# EAGLE board power board1 (EAGLE 9.6.2)
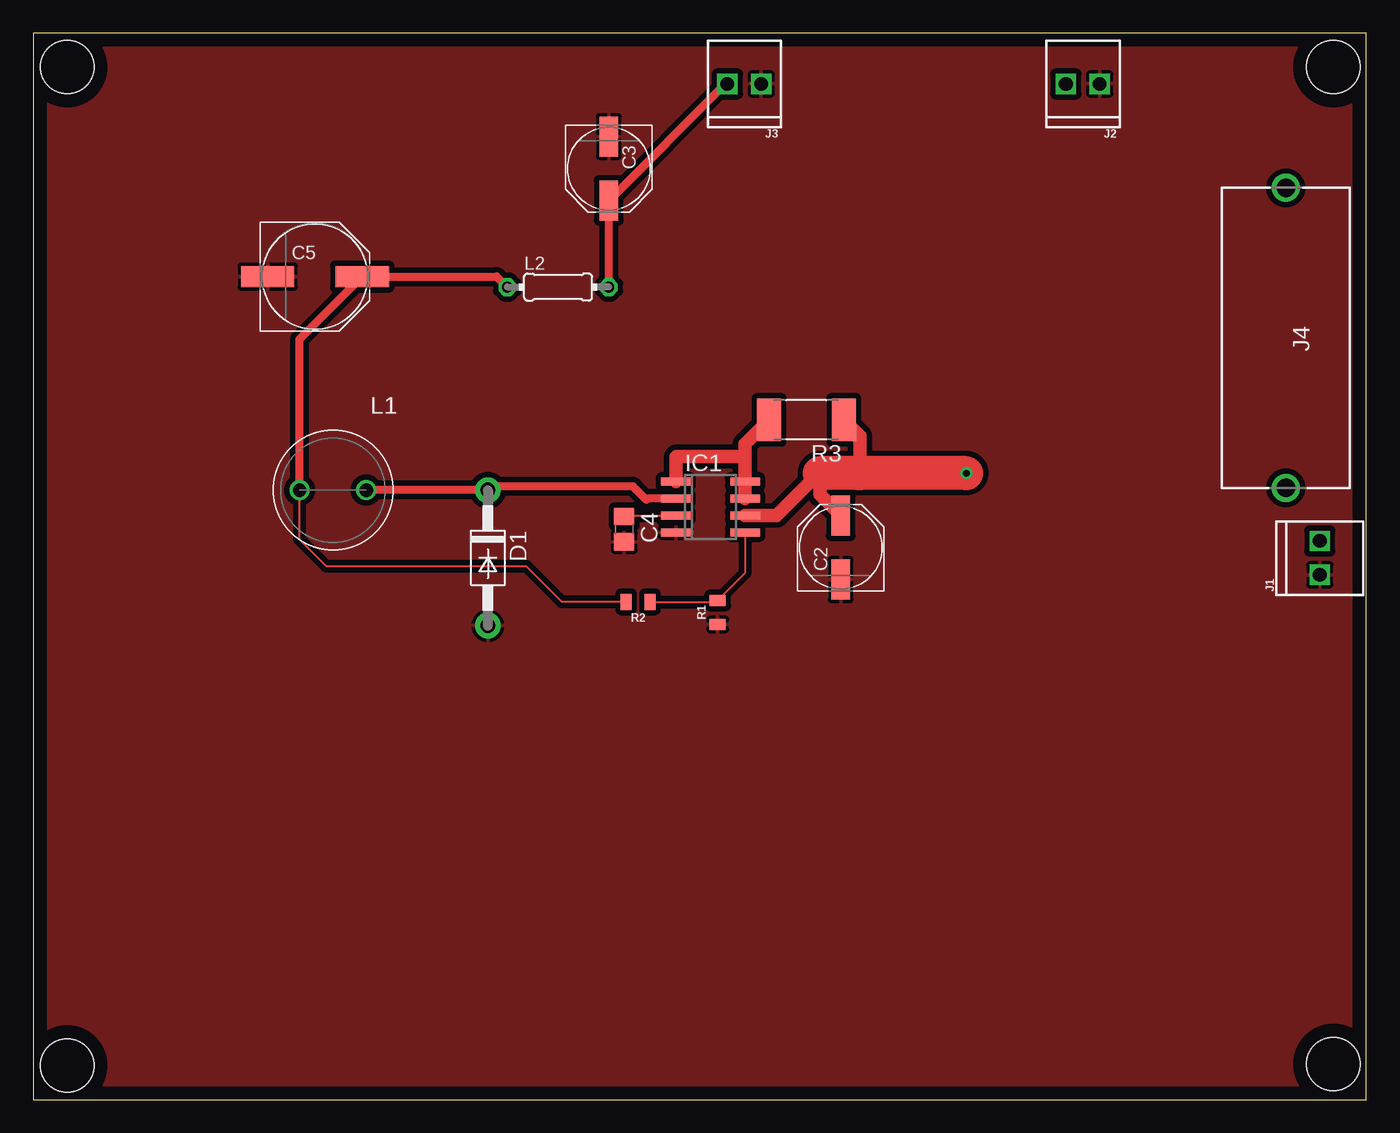
[diagram p0: board, top side]
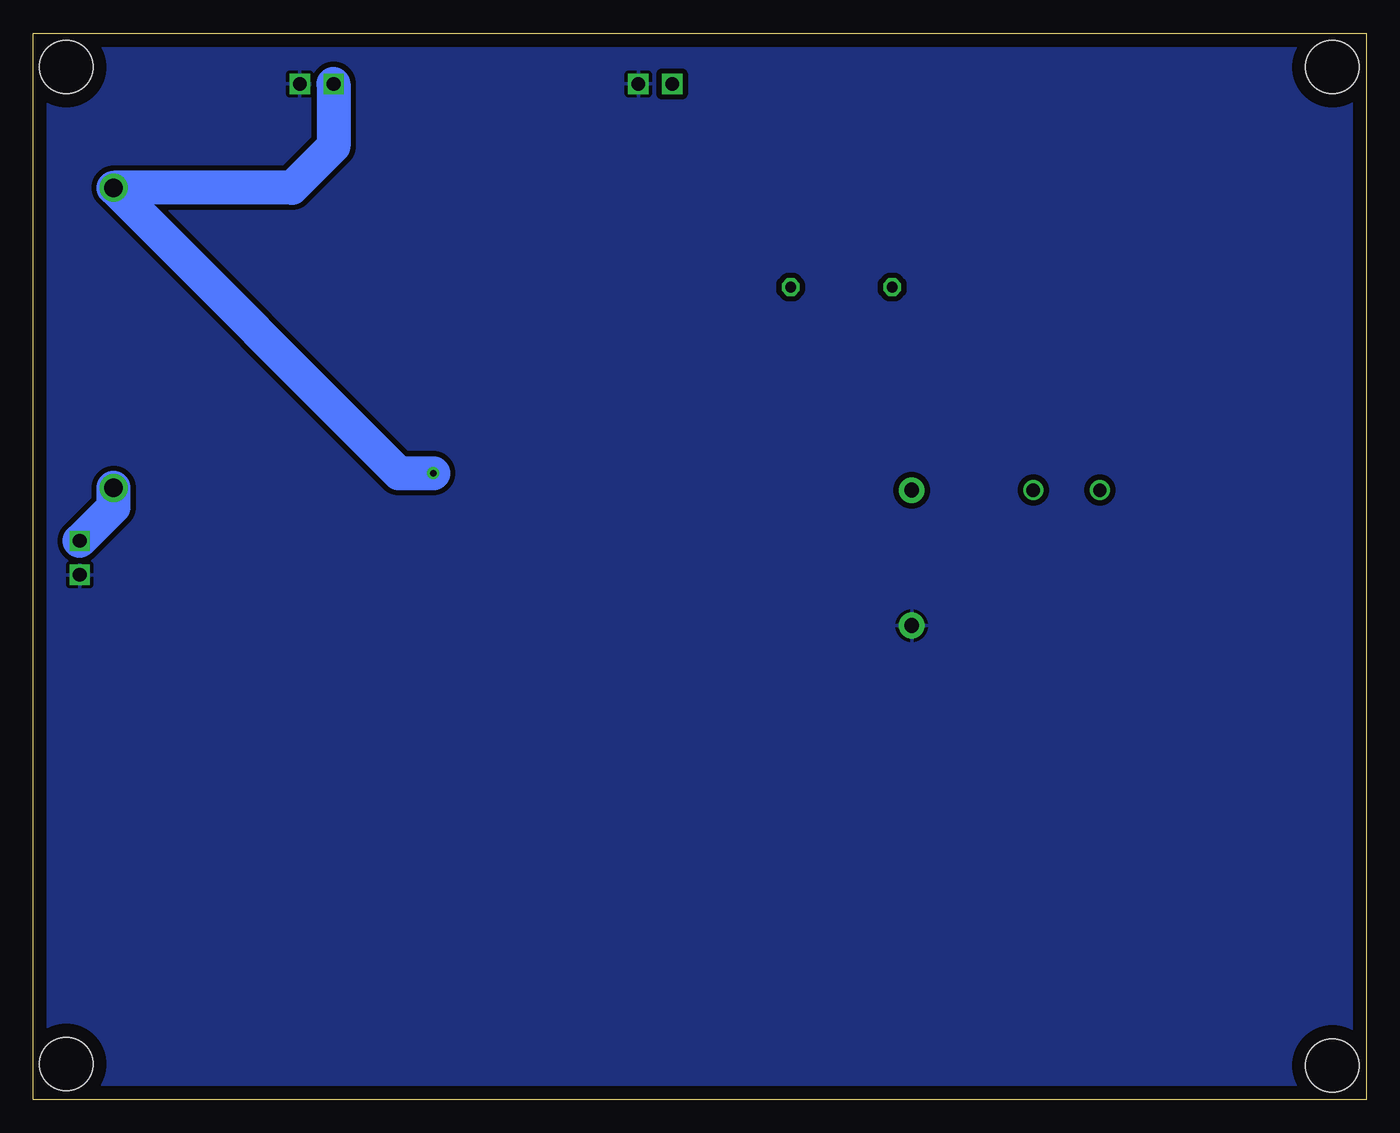
[diagram p1: board, bottom side, seen from below]

Size 100 x 80 mm. Coordinates in mm from the lower left corner, seen from the top.
Outline: 0,0 100,0 100,80 0,80 0,0
Copper layers (1*16): Top 0.035mm / dielectric 1.5mm / Bottom 0.035mm
Design rules "default": minimum track width 6mil, minimum drill 0.35mm, track to track 6mil, track to pad 6mil, pad to pad 6mil, via to via 6mil, smd to smd 6mil, copper to edge 40mil, drill to drill 6mil, minimum pad ring 10mil, minimum via ring 8mil, stop-mask expansion 4mil, vias tented up to drill 0mil, thermal gap 10mil
Holes 4 mm at 2.54,77.47 2.54,2.54 97.54,2.67 97.54,77.47

## Footprints (pad centres in the part's own frame; a part is rotated, then mirrored left to right if it is on the bottom)
PANASONIC_D = smd 3 x 1.4: + 2.4,0; - -2.4,0
C0805 = smd 1.3 x 1.5: 1 -0.95,0; 2 0.95,0
PANASONIC_F = smd 4 x 1.6: + 3.55,0; - -3.55,0
DO41-10 = drill 1.118 pad 1.93: A 5.08,0; C -5.08,0
SOIC8 = smd 0.6 x 2.2: 1 -1.905,-2.6; 2 -0.635,-2.6; 3 0.635,-2.6; 4 1.905,-2.6; 5 1.905,2.6; 6 0.635,2.6; 7 -0.635,2.6; 8 -1.905,2.6
1X02_2.54_SCREWTERM = drill 1.016 square: P1 2.54,0; P2 0,0
0031.8201 = drill 1.4 pad 2.1: 1 -11.25,0; 2 11.25,0
WE-TI_809589 = drill 1 pad 1.5: 1 -2.5,0; 2 2.5,0
0204/7 = drill 0.813 octagon: 1 -3.81,0; 2 3.81,0
0805 = smd 0.8 x 1.2: 1 -0.9,0; 2 0.9,0
R2512 = smd 1.8 x 3.2: 1 -2.8,0; 2 2.8,0

## Placement (x,y rotation side)
C2  100uF  [PANASONIC_D]  60.58,41.4 90 top
C3  100uF  [PANASONIC_D]  43.18,69.85 270 top
C4  470pF  [C0805]  44.32,42.8 270 top
C5  470uF  [PANASONIC_F]  21.13,61.75 0 top
D1  [DO41-10]  34.1,40.64 270 top
IC1  MC34063AD  [SOIC8]  50.8,44.45 270 top
J1  [1X02_2.54_SCREWTERM]  96.52,39.37 90 top
J2  [1X02_2.54_SCREWTERM]  80.01,76.2 180 top
J3  [1X02_2.54_SCREWTERM]  54.61,76.2 180 top
J4  0031.8201  [0031.8201]  93.98,57.15 270 top
L1  744772220  [WE-TI_809589]  22.48,45.72 180 top
L2  1uH  [0204/7]  39.37,60.96 0 top
R1  1.2k  [0805]  51.34,36.55 90 top
R2  3.8k  [0805]  45.37,37.34 180 top
R3  0.33  [R2512]  58,51 180 top

## Library data of the parts
C2 C3 C5 D1 R3 = adafruit
C4 = rcl; SPICEPREFIX: C
IC1 = mc34063
J1-J3 = SparkFun-Connectors
J4 = SamacSys_Parts; DESCRIPTION: Fuse Holder FUSE-HOLDER OGN; HEIGHT: mm; MANUFACTURER_NAME: SCHURTER; MANUFACTURER_PART_NUMBER: 0031.8201; RS_PART_NUMBER: 2508764386; RS_PRICE-STOCK: http://uk.rs-online.com/web/p/products/2508764386
L1 = SamacSys_Parts; DESCRIPTION: Wurth 22 uH +/-10% Ferrite Radial Inductor, 2.3A Idc, 0.055 Rdc WE-TI; HEIGHT: mm; MANUFACTURER_NAME: Wurth Elektronik; MANUFACTURER_PART_NUMBER: 744772220; RS_PART_NUMBER: 4890043P; RS_PRICE-STOCK: http://uk.rs-online.com/web/p/products/4890043P
L2 = rcl; SPICEPREFIX: L
R1 R2 = SparkFun-Resistors; PROD_ID: RES-08474

## Nets
+5V: C3.+ J3.P1 L2.2
+12V: C2.+ IC1.6 J2.P1 J4.1 R3.1
GND: C2.- C3.- C4.2 C5.- D1.A IC1.4 J1.P2 J2.P2 J3.P2 R1.1
N$1: D1.C IC1.2 L1.1
N$2: C5.+ L1.2 L2.1 R2.2
N$3: IC1.1 IC1.7 IC1.8 R3.2
N$4: C4.1 IC1.3
N$5: IC1.5 R1.2 R2.1
N$6: J1.P1 J4.2

## Tracks (layer width: path | path; a pad name or v marks a point on that pad's centre or on a via)
+5V
  Top 0.61: L2.2 C3.+ 51.93,76.2 J3.P1
+12V  (via drill 0.5 pad 0.85)
  Top 1.016: C2.+ 59,45.38 59,47 58.94,47 55.75,43.81 IC1.6 | R3.1 62,49.8 62,47
  Top 2.54: v70,47 62,47 59,47
  Bottom 2.54: v70,47 72.58,47 J4.1 80.6,68.4 77.47,71.53 J2.P1
GND
  pour Top (isolate 0.406): 0,0 100.33,0 100.33,80.01 0,80.01
  pour Bottom (isolate 0.406): 0,0 100,0 100,80 0,80
N$1
  Top 0.61: IC1.2 46.09,45.09 46,45 45,46 34.38,46 D1.C L1.1
N$2
  Top 0.152: R2.2 39.66,37.34 37,40 22,40 19.98,42.02 L1.2
  Top 0.61: L1.2 19.98,57.05 C5.+ 34.77,61.75 L2.1
N$3
  Top 1.016: R3.2 53.4,49.2 53.4,48.26 | 53.4,48.26 IC1.8 IC1.7 | IC1.1 48.2,48.2 48.26,48.26 53.4,48.26
N$4
  Top 0.152: C4.1 44.39,43.81 IC1.3
N$5
  Top 0.152: IC1.5 53.4,39.51 R1.2 51.23,37.34 R2.1
N$6
  Bottom 2.54: J1.P1 93.98,44.45 J4.2